# Altium PCB BC95+SIM.PcbDoc
Units mil, origin at the board's own origin, x right, y up, seen from the top; angles counter-clockwise.
Board outline 6000 x 4000 mil, 2 copper layers (Top Layer, Bottom Layer); 29 components, 20 nets, 164 pads, 6 vias.
Unrouted connection lines stored in the file: 10.
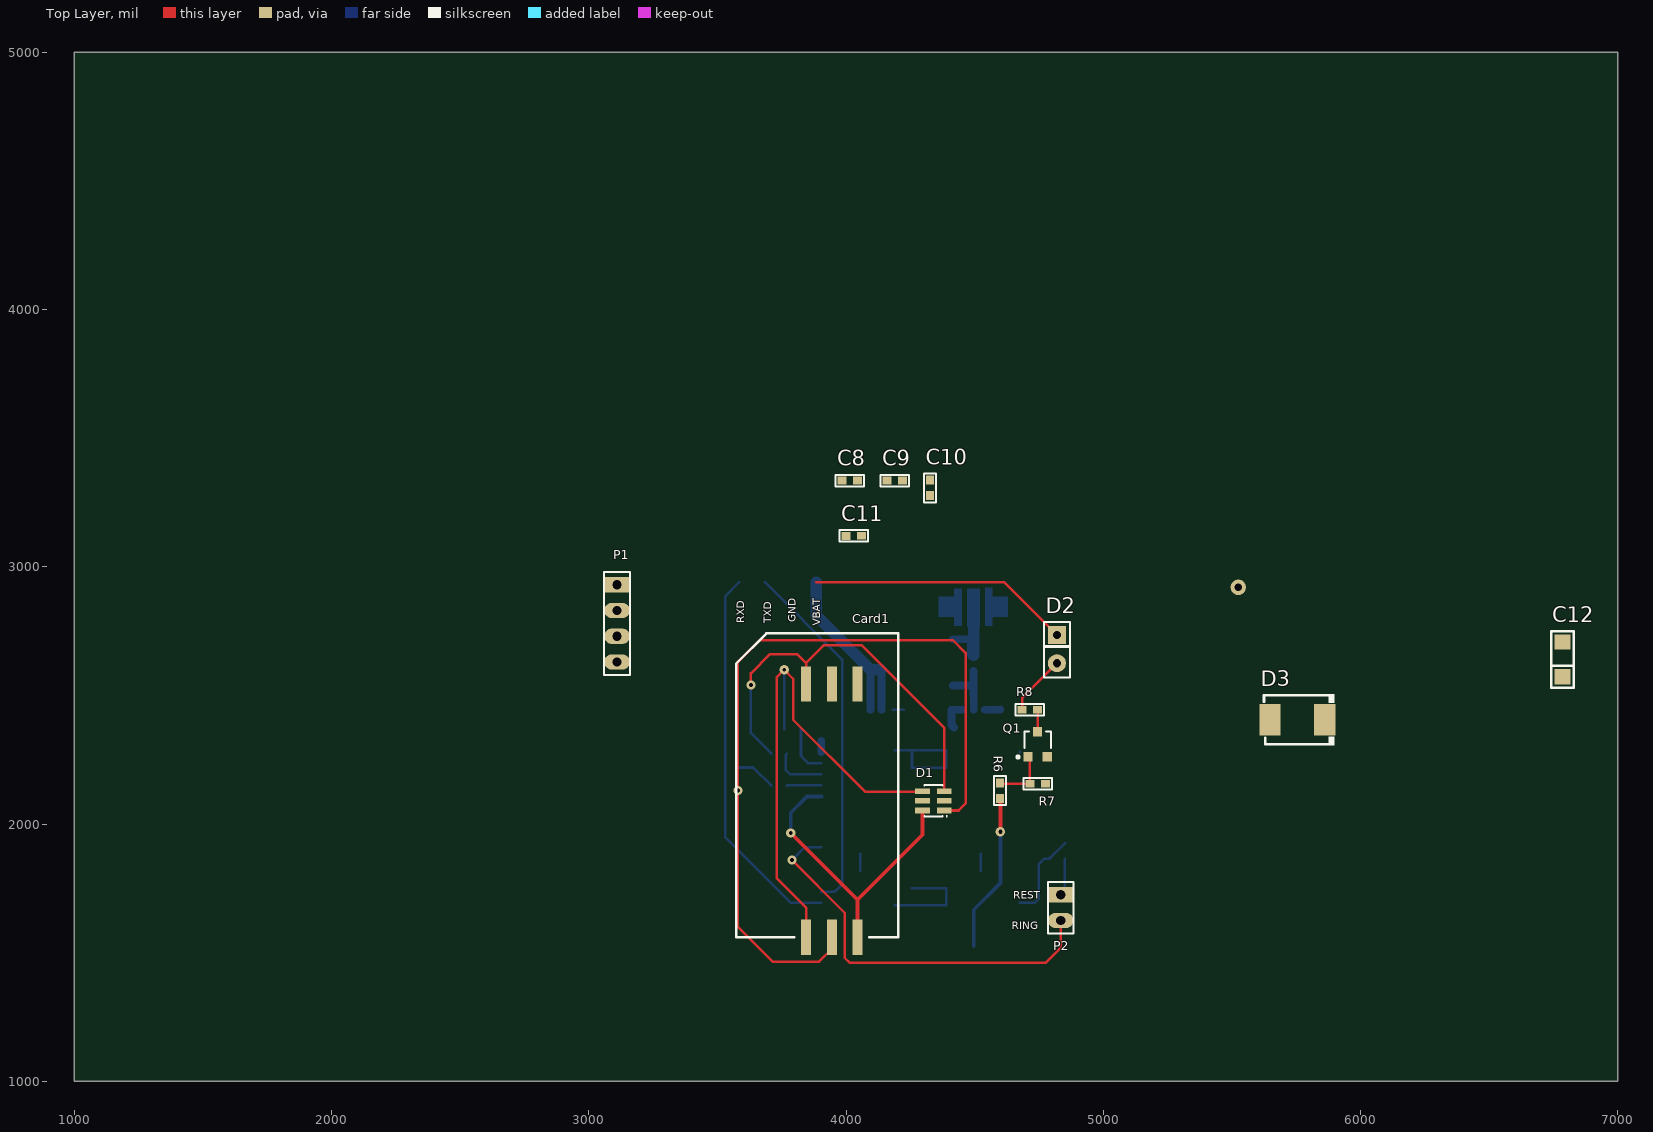
[diagram p0: Top Layer view]
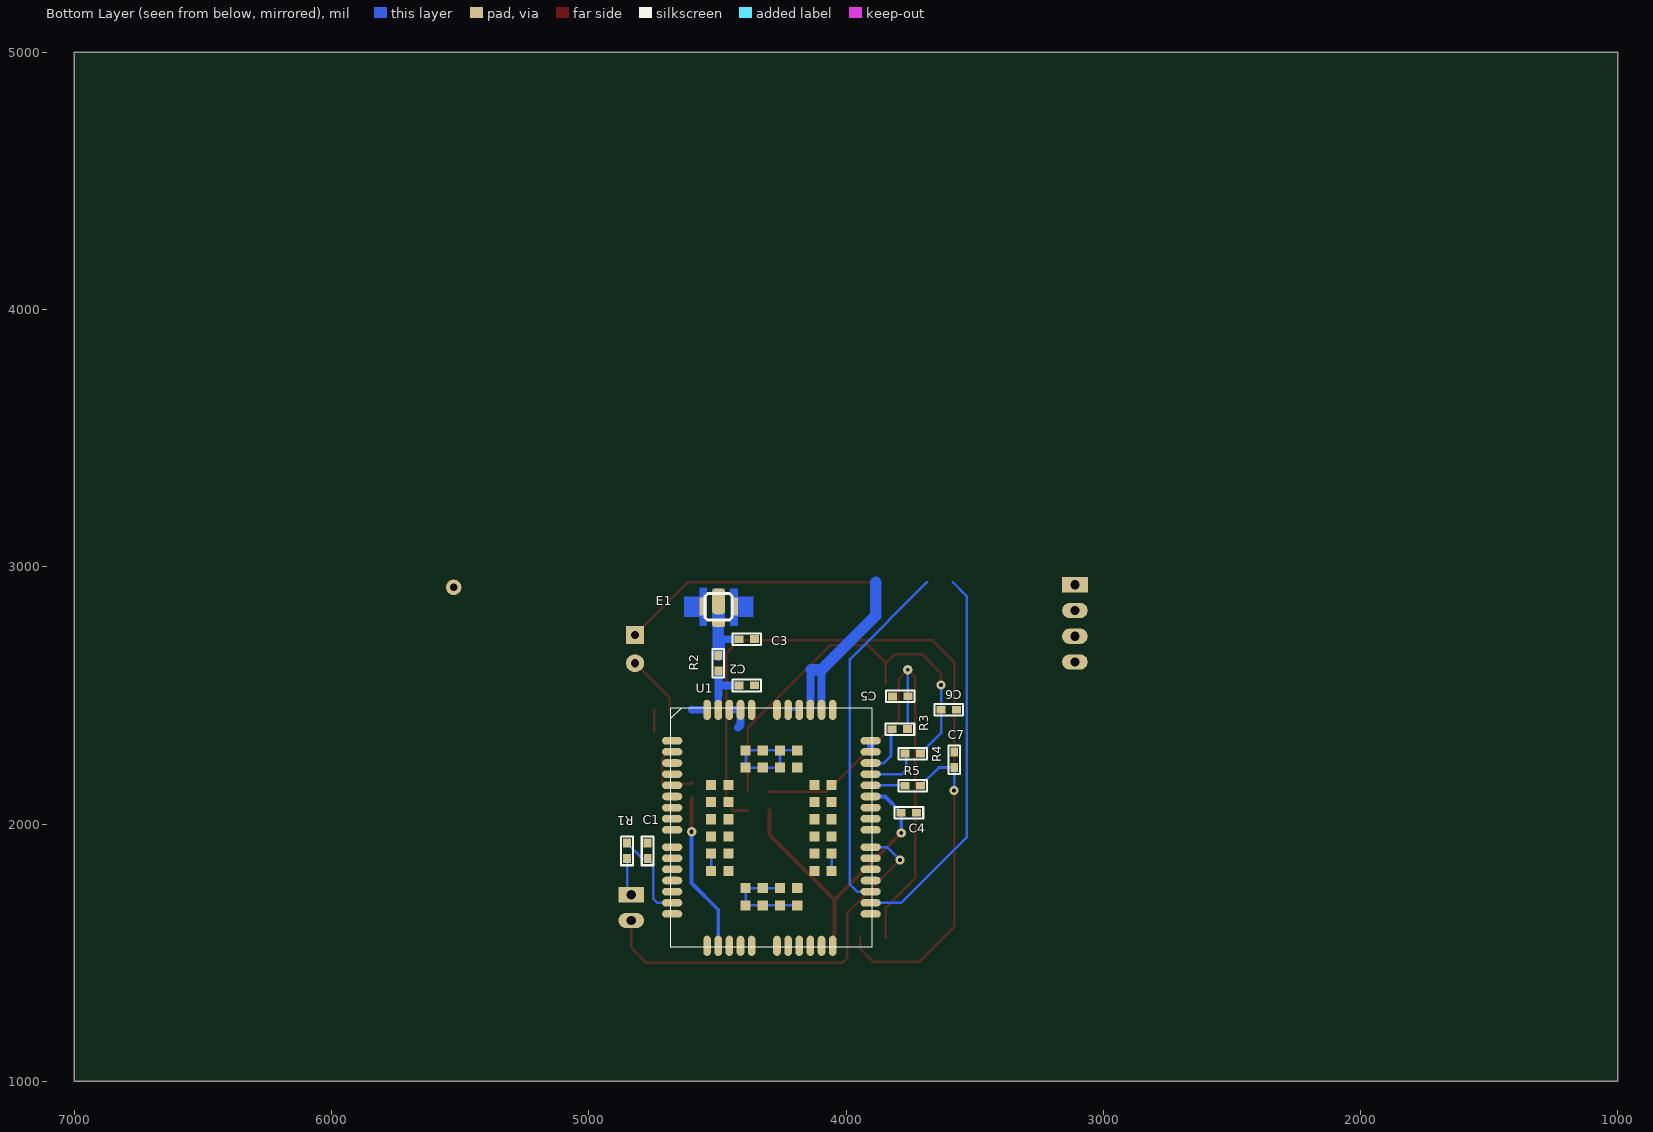
[diagram p1: Bottom Layer view, seen from below]

## Layer stack, top to bottom
Top Solder: solder mask 0.4, Solder Resist, Dk 3.5
Top Layer: signal copper 1.4
Dielectric 1: dielectric 12.6, FR-4, Dk 4.8
Bottom Layer: signal copper 1.4
Bottom Solder: solder mask 0.4, Solder Resist, Dk 3.5

## Board outline
1000,1000 7000,1000 7000,5000 1000,5000

## Design rules (kind name [scope] priority, off if disabled: settings)
Clearance [All] p1: gap=10
PolygonConnect [All] p1: connectstyle=Relief reliefconductorwidth=10 reliefentries=4 polygonreliefangle="90 Angle" airgapwidth=10
RoutingVias [All] p1: holewidth=28 width=50 viastyle="Through Hole" minholewidth=10 minwidth=10 maxholewidth=100 maxwidth=100
SolderMaskExpansion [All] p1: expansion=4
Width [All] p1: maxlimit=100 minlimit=10 preferedwidth=10
30 further rules are at their usual default settings.

## Components (designator, comment, footprint, x,y, rotation, side; value= is the part's Value field where it differs from the comment)
C1 "0.1uF" 0603 4770,1905 r270 bottom
C2 "缺省" 0603 4395,2540 r180 bottom
C3 "缺省" 0603 4395,2720 r180 bottom
C4 "100nF" 0603 3765,2045 r180 bottom
C5 "33pF" 0603 3780,2495 r0 bottom
C6 "33pF" 0603 3610,2445 r180 bottom
C7 "33pF" 0603 3580,2240 r90 bottom
C8 "100uF" 0603 4005.23,3336.34 r0 top
C9 "100nF" 0603 4180.23,3336.34 r0 top
C10 "100pF" 0603 4325.23,3296.34 r90 top
C11 "22pF" 0603 4020.23,3121.34 r0 top
C12 "100uF" 1206 6785,2640 r90 top
Card1 "Card" SIM 4045,1560 r90 top
D1 "SRV05-4" SOT23-6 4340,2090 r90 top
D2 "LED BLUE" LED-3mm 4820,2735 r270 top
D3 "D Zener" DO-214AB 5755,2405 r180 top
E1 "Antenna" IPX 4495,2845 r180 bottom
P1 "Header 4" HDR1X4 3110,2930 r270 top
P2 "Header 2" HDR1X2 4835,1725 r270 top
Q1 "9013" SOT-23 4745,2310 r0 top
R1 "1K" 0603 4850,1905 r270 bottom
R2 "0" 0603 4495,2635 r270 bottom
R3 "22R" 0603 3800,2370 r180 bottom
R4 "22R" 0603 3750,2275 r180 bottom
R5 "22R" 0603 3750,2150 r180 bottom
R6 "Res2" 0603 4600,2140 r270 top
R7 "Res2" 0603 4755,2155 r180 top
R8 "Res2" 0603 4705,2445 r0 top
U1 "BC95" BC95 4290,1985 r180 bottom

## Footprints (in the part's own frame and the unit in brackets; to place one, negate y for a bottom-side part, rotate by r counter-clockwise, add the part's x,y. Pads: shape width x height; smd on the part's side, far side on the other; paste and mask are expansions set on the pad)
0603 [mil] "0603"
  rect 35x30 smd: 1(40,-1) 2(-20.23,-1.34)
  silkscreen extent -46,-24 65,21
1206 [mm]
  rect 1.52x1.6 smd: 1(-1.71,0) 2(1.71,0)
  silkscreen extent -2.79,-1.1 2.79,1.1
BC95 [mm]
  oval 2x0.75 smd: 1(-9.8,8.6) 2(-9.8,7.5) 3(-9.8,6.4) 4(-9.8,5.3) 5(-9.8,4.2) 6(-9.8,3.1) 7(-9.8,2) 8(-9.8,0.9) 9(-9.8,-0.2) 10(-9.8,-1.9) 11(-9.8,-3) 12(-9.8,-4.1) 13(-9.8,-5.2) 14(-9.8,-6.3) 15(-9.8,-7.4) 16(-9.8,-8.5) 28(9.8,-8.5) 29(9.8,-7.4) 30(9.8,-6.3) 31(9.8,-5.2) 32(9.8,-4.1) 33(9.8,-3) 34(9.8,-1.9) 35(9.8,-0.2) 36(9.8,0.9) 37(9.8,2) 38(9.8,3.1) 39(9.8,4.2) 40(9.8,5.3) 41(9.8,6.4) 42(9.8,7.5) 43(9.8,8.6)
  oval 0.75x2 smd: 17(-6.35,-11.65) 18(-5.25,-11.65) 19(-4.15,-11.65) 20(-3.05,-11.65) 21(-1.95,-11.65) 22(0.55,-11.65) 23(1.65,-11.65) 24(2.75,-11.65) 25(3.85,-11.65) 26(4.95,-11.65) 27(6.05,-11.65) 44(6.05,11.65) 45(4.95,11.65) 46(3.85,11.65) 47(2.75,11.65) 48(1.65,11.65) 49(0.55,11.65) 50(-1.95,11.65) 51(-3.05,11.65) 52(-4.15,11.65) 53(-5.25,11.65) 54(-6.35,11.65)
  rect 1x1 smd: 55(-5.95,4.25) 56(-5.95,2.55) 57(-5.95,0.85) 58(-5.95,-0.85) 59(-5.95,-2.55) 60(-5.95,-4.25) 61(-2.55,-7.65) 62(-0.85,-7.65) 63(0.85,-7.65) 64(2.55,-7.65) 65(5.95,-4.25) 66(5.95,-2.55) 67(5.95,-0.85) 68(5.95,0.85) 69(5.95,2.55) 70(5.95,4.25) 71(2.55,7.65) 72(0.85,7.65) 73(-0.85,7.65) 74(-2.55,7.65) 75(-4.25,4.25) 76(-4.25,2.55) 77(-4.25,0.85) 78(-4.25,-0.85) 79(-4.25,-2.55) 80(-4.25,-4.25) 81(-2.55,-5.95) 82(-0.85,-5.95) 83(0.85,-5.95) 84(2.55,-5.95) 85(4.25,-4.25) 86(4.25,-2.55) 87(4.25,-0.85) 88(4.25,0.85) 89(4.25,2.55) 90(4.25,4.25) 91(2.55,5.95) 92(0.85,5.95) 93(-0.85,5.95) 94(-2.55,5.95)
  silkscreen extent -9.96,-11.8 9.96,11.8
DO-214AB [mm]
  rect 2.1x3.1 smd: 1(2.7,0) 2(-2.7,0)
  silkscreen extent -3.68,-2.54 3.3,2.54
HDR1X2 [mm] "Connector; Header; 2 Position"
  rect 1.5x2.54 hole 0.9: 1(0,0)
  oval 1.5x2.54 hole 0.9: 2(2.54,0)
  silkscreen extent -1.27,-1.27 3.81,1.27
HDR1X4 [mm] "Connector; Header; 4 Position"
  rect 1.5x2.54 hole 0.9: 1(0,0)
  oval 1.5x2.54 hole 0.9: 2(2.54,0) 3(5.08,0) 4(7.62,0)
  silkscreen extent -1.27,-1.27 8.89,1.27
IPX [mil]
  rrect50% 50x31.5 smd: 1(0,-63)
  rect 27.56x70.87 smd: 2(61,1) 4(-61,1)
  silkscreen extent -53,-52 53,51
LED-3mm [mil] "Connector; Header; 5 Position"
  rect 70x70 hole 31.5: 1(0,0)
  round 70 hole 31.5: 2(110,0)
  silkscreen extent -50,-50 165,50
SIM [mm]
  rect 3.5x1 smd: 1(0,0) 2(0,2.54) 3(0,5.08) 4(25,0) 5(25,2.54) 6(25,5.08)
  silkscreen extent 0,-4 30,12
SOT23-6 [mm] "SOT-23/SC-74A; 5 Leads; Body 3.1 x 3 mm, inc. leads (LxW max)"
  rect 0.55x1.45 smd: 1(-0.95,-1.075) 2(0,-1.075) 3(0.95,-1.075) 4(0.95,1.075) 5(0,1.075) 6(-0.95,1.075)
  silkscreen extent -1.57,-1.35 1.55,0.9
SOT-23 [mm] "SOT-23; 3 Leads; Body 3.0 x 2.6 mm, inc. leads (LxW max)"
  rect 0.9x0.95 smd: 1(-0.95,-1.25) 2(0.95,-1.25) 3(0,1.25)
  silkscreen extent -2.07,-1.37 1.3,1.25

## Part data
C1 C2 C3 C4 C5 C6 C7 C8 C9 C10 C11: library part Cap, "Capacitor"
C12: library part "Cap Pol1", "插件 电解电容 13*21"
D1: library part SMF05C, "SOT363"
D2: library part LED0, "插件 发光二极管 5mm 红发红光"
D3: "Zener Diode"
E1: "Generic Antenna"
P1: "Header, 4-Pin"
P2: "Header, 2-Pin"
Q1: library part NPN, "贴片三极管MMBT5551 SOT-23"
R1 R2: library part Res2, "Resistor"
R3 R4 R5: library part Resistor, "贴片电阻 0603"
R6 R7 R8: "Resistor"

## Free pads (board coordinates)
  rrect50% 50x100 smd far side: 1(4495,2865)
  round 60 hole 30: 2(5525,2920)

## Via types
v1: diameter 36, hole 15, Top Layer to Bottom Layer, 5 vias
v2: diameter 36, hole 16, Top Layer to Bottom Layer, 1 vias

## Nets (pads, with @x,y where several pads share a name; then routed paths per layer and width w, separated by ;. In a path a pad name is that pad's centre, name@x,y a point inside that pad or via, vN(x,y) a via of type N, cw(c..) or ccw(c..) an arc to the next point about the centre after c; other vN are vias at no path point)
GND: C1.2 C2.1 C3.1 C4.1 C5.1 C6.1 C7.1 C8.1 C9.1 C10.1 C11.1 C12.2 Card1.4 D1.2 D3.1 P1.2 Q1.2 R7.2 U1.2 U1.42 U1.43 U1.47 U1.48 U1.51 U1.52 U1.54 U1.59 U1.60 U1.61 U1.62 U1.63 U1.64 U1.65 U1.66 U1.71 U1.72 U1.73 U1.74 U1.81 U1.82 U1.83 U1.92 U1.93 U1.94 | length 1267.6
  Bottom Layer w10: U1.65 U1.66 ; U1.47 U1.48 ; U1.64 U1.63 U1.62 U1.61 U1.81 U1.82 U1.83 ; U1.71 U1.72 ; U1.60 U1.59 ; U1.2@4675.55,2280 U1.2 ; U1.72 U1.73 U1.74 U1.94 U1.93 U1.92 U1.72
  Bottom Layer w30: U1.42 U1.43 ; 4420,2375 4410.08,2384.92 U1.51 U1.52 ; U1.54 4598.66,2443.66 4600,2445
NetC1_1: C1.1 R1.2 U1.15 | length 349.9
  Bottom Layer w10: U1.15 4733.66,1693.66 4750,1710 4750,1844 C1.1 4791.11,1865 R1.2
NetC3_2: C3.2 E1.1 pad.1 R2.2 | length 267.6
  Bottom Layer w30: C3.2 4489.02,2718.66 4492.68,2715
  Bottom Layer w45: 4492.68,2715 4492.68,2658.89 R2.2 4496.34,2780.66 E1.1
NetC5_2: C5.2 Card1.3 D1.4 R3.1 | length 2159.9
  Top Layer w10: Card1.3 3845,1675 3730,1790 3730,2570 v1(3759.77,2599.77) 3795,2564.54 3795,2405 4075,2125 4295.28,2125 D1.4
  Bottom Layer w10: R3.1 3760,2496.11 C5.2 v1(3759.77,2599.77) v1@3760,2600
NetC6_2: C6.2 Card1.6 D1.3 R4.1 | length 1635.5
  Top Layer w10: v1(3630.23,2540) 3630.23,2585.23 3705,2660 3810,2660 3845,2625 ; Card1.6 3845,2625 ; D1.3 4382.32,2372.68 4060,2695 3915,2695 3845,2625
  Bottom Layer w10: v1@3630,2545 3630.23,2544.77 v1(3630.23,2540) C6.2 3630.23,2353.77 R4.1
NetC7_2: C7.2 Card1.2 D1.1 R5.1 | length 3387.6
  Top Layer w10: Card1.2 3945,1515 3895,1465 3715,1465 3580,1600 v1(3580,2130) 3580,2630 3665,2715 4415,2715 4465,2665 4465,2080 4437.6,2052.6 D1.1
  Bottom Layer w10: v1(3580,2130) 3578.66,2131.34 C7.2 3639.23,2219.77 R5.1
NetD2_2: D2.2 R8.2 | length 237.4
  Top Layer w10: R8.2 4684.77,2489.77 D2.2
NETLIGHT: R6.1 U1.18 | length 616.9
  Top Layer w15: R6.1 4600,2099 v2(4600,1970)
  Bottom Layer w15: U1.18 4496.69,1666.69 4600,1770 v2(4600,1970)
NetQ1_1: Q1.1 R6.2 R7.1 | length 225.9
  Top Layer w10: R6.2 4602.89,2156 R7.1 4715,2253.39 Q1.1
NetQ1_3: Q1.3 R8.1 | length 84.8
  Top Layer w10: Q1.3 R8.1
REST: P2.1 R1.1 | length 150.2
  Bottom Layer w10: P2.1@4835,1720 P2.1@4837.5,1722.5 ; P2.1 4851,1741 R1.1
RF_ANT: C2.2 R2.1 U1.53 | length 234.7
  Bottom Layer w30: C2.2 4490.35,2538.66 4496,2544.31 ; R2.1 4496,2544.31 ; U1.53 4496.69,2500 4496,2500.69 4496,2544.31
RING: P2.2 U1.34 | length 1573
  Top Layer w10: v1(3790,1860) 3995,1655 3995,1480 4015,1460 4775,1460 4835,1520 P2.2@4835,1620
  Bottom Layer w10: v1(3790,1860) 3840.2,1910.2 U1.34
RXD: P1.4 U1.29 | length 1493.1
  Bottom Layer w10: 3585,2940 3530,2885 3530,1950 3786.34,1693.66 U1.29
TXD: P1.3 U1.30 | length 1391.7
  Bottom Layer w10: 3685,2940 3985,2640 3985,1765 3956.97,1736.97 U1.30
USIM_CLK: R3.2 U1.41 | length 195.8
  Bottom Layer w10: R3.2@3825,2370 3825,2265 3853.03,2236.97 U1.41
USIM_DATA: R4.2 U1.40 | length 211.8
  Bottom Layer w10: R4.2 3765,2268.43 3765,2210 3781.34,2193.66 U1.40
USIM_RST: R5.2 U1.39 | length 134.6
  Bottom Layer w10: R5.2 3771.92,2150.35 U1.39
USIM_VDD: C4.2 Card1.1 D1.6 U1.38 | length 1188.6
  Top Layer w15: v1(3785.23,1965.23) 4045,1705.46 ; Card1.1 4045,1705.46 ; D1.6 4297.68,1958.14 4045,1705.46
  Bottom Layer w15: v1@3785,1965 v1(3785.23,1965.23) C4.2 3848.62,2107.05 U1.38
VBAT: C8.2 C9.2 C10.2 C11.2 C12.1 D2.1 D3.2 P1.1 U1.45 U1.46 | length 1800.9
  Top Layer w10: 3885,2940 4615,2940 D2.1
  Bottom Layer w30: U1.45 4095.12,2599.88 ; 4135.12,2599.88 4138.43,2596.57 U1.46
  Bottom Layer w45: 3885,2940 3885,2810 4095.12,2599.88 4135.12,2599.88
pads on no net: Card1.5 D1.5 E1.2 E1.4 U1.1 U1.3 U1.4 U1.5 U1.6 U1.7 U1.8 U1.9 U1.10 U1.11 U1.12 U1.13 U1.14 U1.16 U1.17 U1.19 U1.20 U1.21 U1.22 U1.23 U1.24 U1.25 U1.26 U1.27 U1.28 U1.31 U1.32 U1.33 U1.35 U1.36 U1.37 U1.44 U1.49 U1.50 U1.55 U1.56 U1.57 U1.58 U1.67 U1.68 U1.69 U1.70 U1.75 U1.76 U1.77 U1.78 U1.79 U1.80 U1.84 U1.85 U1.86 U1.87 U1.88 U1.89 U1.90 U1.91

## Other copper
Top Layer:
  pour cut-out: 3735,2990 3735,2890 3535,2890 3535,2990
Bottom Layer:
  rectangle: 4540,2805 4630,2885
  rectangle: 4360,2805 4450,2885
  rectangle: 4420,2770 4450,2915
  rectangle: 4540,2770 4570,2920
  rectangle net NetC3_2: 4470,2765 4520,2915
  pour cut-out: 4450,2770 4455,2765 4475,2765 4475,2985 4470,2990 4450,2990
  pour cut-out: 4520,2765 4520,2990 4540,2990 4540,2975 4540,2960 4540,2880 4540,2825 4540,2800 4540,2785 4540,2770 4535,2770 4530,2765
  pour cut-out: 3735,2990 3735,2890 3535,2890 3535,2990
  pour cut-out: 4420,2990 4360,2990 4360,2770 4420,2770
  pour cut-out: 4630,2990 4570,2990 4570,2770 4630,2770
  pour cut-out: 4475,2765 4470,2770 4385,2770 4385,2485 4595,2485 4600,2490 4600,2770 4390,2770
  pour cut-out: 4450,2990 4450,3000 4540,3000 4540,2990

## Silkscreen, mask and mechanical layers (free items; w line width, h text height)
Top Overlay:
  text "GND" at 3805,2785 h30 r90
  text "RXD" at 3605,2780 h30 r90
  text "TXD" at 3710,2780 h30 r90
  text "VBAT" at 3900,2770 h30 r90
  text "REST" at 4650,1710 h30
  text "RING" at 4645,1590 h30
Mechanical 1:
  lines w5: 3515,1445 4900,1445 4900,3005 3515,3005 3515,1445